# Altium PCB TP5602(生产过的板）-20160328.PcbDoc
Units mm, origin at the board's own origin, x right, y up, seen from the top; angles counter-clockwise.
Board outline 64.59 x 20.7 mm, 2 copper layers (Top Layer, Bottom Layer); 52 components, 28 nets, 152 pads, 418 vias.
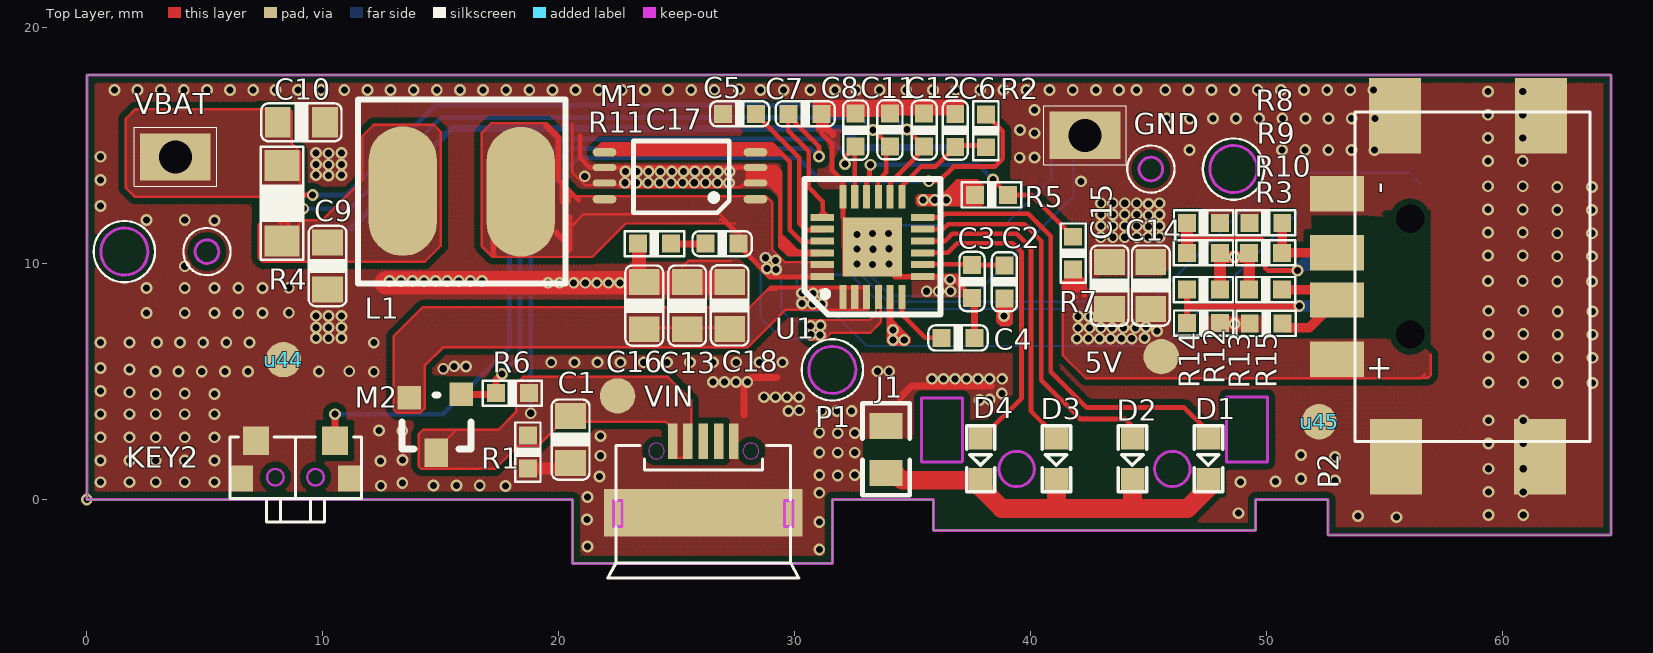
[diagram p0: Top Layer view]
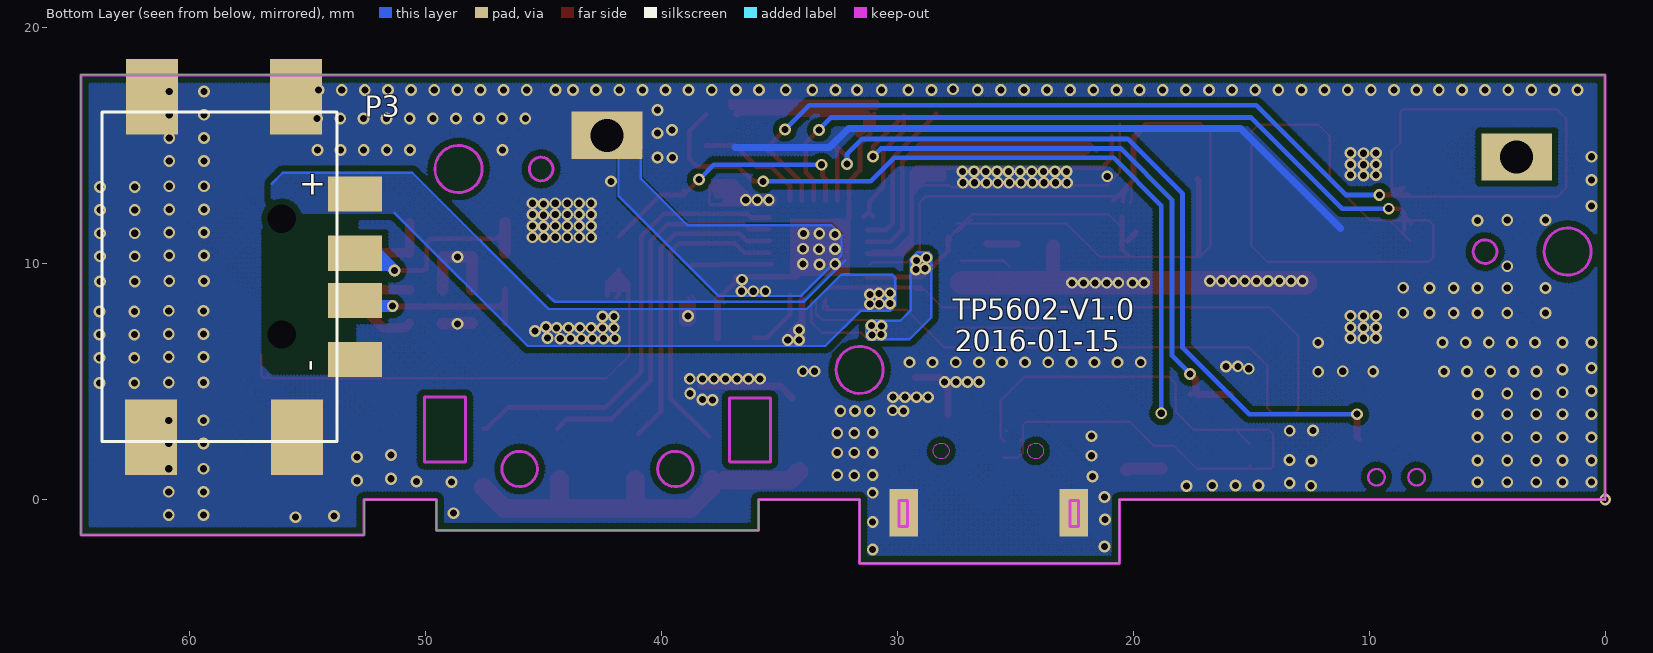
[diagram p1: Bottom Layer view, seen from below]

## Layer stack, top to bottom
Top Layer: signal copper 0.0356
Dielectric: core 0.32, FR-4, Dk 4.8
Bottom Layer: signal copper 0.0356

## Board outline
20.591,0 20.591,-2.7 31.591,-2.7 31.591,0 35.871,0 35.871,-1.3 49.531,-1.3 49.531,0 52.591,0 52.591,-1.5 64.591,-1.5 64.591,18 0,18 0,0

## Design rules (kind name [scope] priority, off if disabled: settings)
Clearance [All] p1: gap=0.254
Clearance ALL [All] p2: gap=0.254
Clearance "polygon to polygon" [InPolygon vs InPolygon] p3: gap=0.3
Clearance "ALL to polygon" [All vs InPolygon] p4: gap=0.3
ComponentClearance [All] p1: gap=0.1 collisioncheckmode=3 verticalgap=0.1 showdistances=FALSE
PlaneConnect [All] p1: planeconnectstyle=Direct reliefexpansion=0.508 reliefentries=4 reliefconductorwidth=0.254 reliefairgap=0.254
PolygonConnect [All] p1: connectstyle=Direct reliefconductorwidth=0.254 reliefentries=4 polygonreliefangle="90 Angle"
RoutingVias [All] p1: holewidth=0.3 width=0.5 viastyle="Through Hole" minholewidth=0.3 minwidth=0.5 maxholewidth=0.3 maxwidth=0.5
SilkscreenOverComponentPads SilkToSolderMaskClearance [IsPad] p1: minsilkscreentomaskgap=0.254
SolderMaskExpansion [All] p1: expansion=0.102
TestPointUsage [All] p1: valid=0 allowmultiple=FALSE
Testpoint [All] p1: side=3 testpointundercomponent=TRUE minsize=1.016 maxsize=2.54 preferedsize=1.524 minholesize=0 maxholesize=1.016 preferedholesize=0.813 testpointgrid=0.025 style=297 order=0-112345678
Width [All] p1: maxlimit=2 minlimit=0.1 preferedwidth=0.2
21 further rules are at their usual default settings.

## Components (designator, comment, footprint, x,y, rotation, side; value= is the part's Value field where it differs from the comment)
5V "Comment" TP1.5 45.53,6.06 r270 top
C1 "22uF/1206/10V" C_0805 20.499,3.543 r270 top
C2 "2.2uF/0603/10V" C_0603 38.88,9.93 r270 top
C3 "1uF/0603/10V" C_0603 37.51,9.94 r270 top
C4 "1uF/0603/10V" C_0603 36.22,6.85 r0 top
C5 "4.7uF/0603/10V" C_0603 28.36,16.35 r180 top
C6 "2.2uF/0603/10V" C_0603 36.8,16.35 r270 top
C7 "100nF/0603/10V" C_0603 31.14,16.35 r180 top
C8 "100nF/0603/10V" C_0603 32.58,14.96 r90 top
C9 "22uF/0805/10V" C_0805 10.2,10.9 r270 top
C10 "22uF/0805/10V" C_0805 8.09,15.99 r0 top
C11 "100nF/0603/10V" C_0603 34.03,16.37 r270 top
C12 "100nF/0603/10V" C_0603 35.48,16.36 r270 top
C13 "22uF/0805/10V" C_0805 25.44,7.22 r90 top
C14 "22uF/0805/10V" C_0805 45.09,8.07 r90 top
C15 "22uF/0805/10V" C_0805 43.34,8.07 r90 top
C16 "100nF/0805/10V" C_0805 23.62,7.22 r90 top
C17 "22nF/0805/25V" C_0603 27.617,10.851 r180 top
C18 "22uF/0805/10V" C_0805 27.24,7.23 r90 top
D1 "LED" D0603 47.53,1.74 r270 top
D2 "LED" D0603 44.317,1.74 r270 top
D3 "LED" D0603 41.083,1.74 r270 top
D4 "LED" D0603 37.88,1.74 r270 top
GND "TP" HP 42.04,15.44 r0 top
J1 "1K/1206/+/-5%" R0805 33.87,1.13 r90 top
KEY2 "Comment" "SW 2*4 CESHI" 8.84,0.95 r180 top locked
L1 "Comment" L-CD75 15.89,13.06 r0 top
M1 "NCE8205A/TSSOP8" TSSOP-8 21.13,15.2 r0 top
M2 "NCE2301/SOT23" SOT-23 15.77,4.31 r180 top
P1 "Comment" "MICRO USB SMD" 26.141,2.46 r180 top locked
P2 "Comment" "USB SMD *10" 56.08,9.45 r90 top locked
P3 "Comment" "USB SMD *10" 56.08,9.45 r270 bottom locked
R1 "0603/1K/+/-5%" R_0603 18.69,2.71 r270 top
R2 "1M/0603+/-5%" R_0603 38.1,16.33 r270 top
R3 "NC/0603" R_0603 49.28,7.47 r0 top
R4 "14mOHM/1206/+/-1%" R_1206 8.27,10.96 r270 top
R5 "100K/0603/+/-1%" R_0603 37.64,12.91 r0 top
R6 "1M/0603+/-5%" R_0603 17.33,4.51 r0 top
R7 "1M/0603/+/-1%" R_0603 41.8,11.14 r270 top
R8 "NC/0603" R_0603 49.26,11.73 r0 top
R9 "NC/0603" R_0603 50.652,10.46 r180 top
R10 "NC/0603" R_0603 50.652,8.9 r180 top
R11 "3ohm/0805/+/-5%" R_0603 24.75,10.846 r180 top
R12 "" R_0603 46.62,10.46 r0 top (schematic designator RA4)
R13 "" R_0603 46.62,8.9 r0 top (schematic designator RB4)
R14 "" R_0603 48.02,11.73 r180 top (schematic designator RA3)
R15 "" R_0603 48.022,7.48 r180 top (schematic designator RB3)
U1 "TP5602" "TP5602 QFN4X4-24" 33.29,10.71 r90 top
u44 "Comment" TP1.5 8.33,5.93 r270 top
u45 "Comment" TP1.5 52.22,3.3 r270 top
VBAT "TP" HP 4.001,14.526 r180 top
VIN "Comment" TP1.5 22.49,4.4 r270 top

## Footprints (in the part's own frame and the unit in brackets; to place one, negate y for a bottom-side part, rotate by r counter-clockwise, add the part's x,y. Pads: shape width x height; smd on the part's side, far side on the other; paste and mask are expansions set on the pad)
C_0603 [mil]
  rect 30x30 smd: 1(0,0) 2(55,0)
  silkscreen extent -22,-21 77,21
C_0805 [mm]
  rect 1.1x1.3 smd: 1(0,0) 2(2,0)
  silkscreen extent -0.7,-0.8 2.7,0.8
D0603 [mm] "LED"
  rect 1x1 smd: 1(-0.889,0) 2(0.889,0)
  silkscreen extent -1.4,-0.6 1.4,0.6
HP [mm]
  rect 3x2 hole 1.4: 1(0.254,0)
  silkscreen extent -1.5,-1.25 2,1.25
L-CD75 [mm]
  oval 2.9x5.5 smd: 1(-2.5,0.013) 2(2.5,-0.013)
  silkscreen extent -4.4,-3.9 4.4,3.9
"MICRO USB SMD" [mm]
  rect 0.4x1.5 smd: 1(1.32,-0.01) 2(0.67,-0.01) 3(0.02,-0.01) 4(-0.63,-0.01) 5(-1.28,-0.01)
  rect 1.2x2 all layers, no hole: 5(-3.58,3.019) 5(3.62,3.019)
  rect 7x2 smd: 5(0.02,3.019)
  Keep-Out Layer circle w0.025: c-1.997,0.399 r0.336
  Keep-Out Layer circle w0.025: c2.003,0.399 r0.336
  Keep-Out Layer lines w0.127: 3.818,3.597 3.468,3.597 3.468,2.497 3.818,2.497 3.818,3.597 ; -3.432,3.597 -3.432,2.497 -3.782,2.497 -3.782,3.597 -3.682,3.597 -3.432,3.597
  silkscreen extent -4.03,0.16 4.07,5.78
R0805 [mm]
  rect 1.1x1.4 smd: 1(0,0) 2(2,0)
  silkscreen extent -0.95,-1 2.95,1
R_0603 [mil]
  rect 30x30 smd: 1(0,0) 2(55,0)
  silkscreen extent -22,-21 77,21
R_1206 [mm]
  rect 1.3x1.5 smd: 1(0,0) 2(-3.2,0)
  silkscreen extent -4,-0.9 0.8,0.9
SOT-23 [mm]
  rect 1x1.2 smd: d(0.965,2.323)
  rect 1x1 smd: g(-0.1,-0.15) s(2.1,0)
  silkscreen extent -0.51,-0.13 2.41,2.16
"SW 2*4 CESHI" [mm]
  rect 1x1.1 smd: 1(-2.3,0.05) 1(2.3,0.05)
  rect 1.1x1.2 smd: 3(-1.675,-1.55) 4(1.675,-1.55)
  Keep-Out Layer circle w0.1: c0.85,0 r0.35
  Keep-Out Layer circle w0.1: c-0.85,0 r0.35
  silkscreen extent -2.79,-1.7 2.77,1.9
TP1.5 [mm] "1.5MM测试点"
  round 1.5 smd: 1(0,0)
"TP5602 QFN4X4-24" [mm]
  rect 2.5x2.5 smd: 0(0,0)
  rect 1x0.3 smd: 1(-2.125,1.25) 2(-2.125,0.75) 3(-2.125,0.25) 4(-2.125,-0.25) 5(-2.125,-0.75) 6(-2.125,-1.25) 13(2.125,-1.25) 14(2.125,-0.75) 15(2.125,-0.25) 16(2.125,0.25) 17(2.125,0.75) 18(2.125,1.25)
  rect 0.3x1 smd: 7(-1.25,-2.125) 8(-0.75,-2.125) 9(-0.25,-2.125) 10(0.25,-2.125) 11(0.75,-2.125) 12(1.25,-2.125) 19(1.25,2.125) 20(0.75,2.125) 21(0.25,2.125) 22(-0.25,2.125) 23(-0.75,2.125) 24(-1.25,2.125)
  silkscreen extent -2.88,-2.88 2.88,2.88
TSSOP-8 [mm]
  oval 1x0.35 smd: 1(7.206,-2.47) 4(7.206,-0.48) 5(0.806,-0.48) 8(0.806,-2.47)
  oval 1x0.3 smd: 2(7.206,-1.78) 3(7.206,-1.13) 6(0.806,-1.13) 7(0.806,-1.78)
  silkscreen extent 2.03,-3.05 6.1,0
"USB SMD *10" [mm]
  rect 3.2x2.2 smd: 0(-7.625,-5.5) 0(-7.625,0.6) 0(6.81,-5.54) 0(6.81,0.64)
  rect 1.5x2.3 smd: 1(-3.5,3.1) 2(-0.99,3.1) 3(1.01,3.1) 4(3.51,3.1)
  round 1 hole 1.2 unplated: 7(2.45,0) 8(-2.45,0)
  silkscreen extent -6.98,-7.62 6.98,2.35

## Part data
C1 C2 C3 C4 C5 C6 C7 C8 C9 C10 C11 C12 C13 C14 C15 C16 C17 C18: library part CAP, "Capacitor"
J1 R9 R10 R11: library part RES1
M1: library part "MOSFET N"
M2: library part "MOSFET P"
R1 R2 R3 R4 R5 R6 R7 R8 R12 R13 R14 R15: library part (R)ordinary

## Via types
v1: diameter 0.5, hole 0.3, Top Layer to Bottom Layer, tented both sides, 418 vias

## Nets (pads, with @x,y where several pads share a name; then routed paths per layer and width w, separated by ;. In a path a pad name is that pad's centre, name@x,y a point inside that pad or via, vN(x,y) a via of type N, cw(c..) or ccw(c..) an arc to the next point about the centre after c; other vN are vias at no path point)
D1-: P3.2 R12.1 R14.2 | length 9.1
  Top Layer w0.2: 46.62,11.06 49.76,11.06 49.94,10.88 49.94,9.81 50.04,9.71 v1(51.3,9.71)
  Top Layer w0.5: R12.1 46.62,11.06 R14.2@46.62,11.727
  Bottom Layer w0.2: P3.2@52.03,10.44 P3.2
  Bottom Layer w0.5: v1(51.3,9.71) P3.2@52.03,10.44
D2+: P3.3 R13.1 R15.2 | length 10.2
  Top Layer w0.254: R15.2 46.625,8.18 ; R13.1@46.625,8.895 46.625,8.18 ; v1(51.38,8.2) 51.36,8.18 46.625,8.18
  Bottom Layer w0.3: P3.3@52.4,9.02 P3.3 P3.3@52.47,8.44 ; P3.3@53,9.02 P3.3@53.02,9.02 ; P3.3@53.52,8.52 P3.3@53.02,9.02 ; P3.3@53.64,9.02 P3.3@53.02,9.02
  Bottom Layer w0.5: v1(51.38,8.2) P3.3@52.74,8.2
D+: P2.3 R8.2 R9.1 | length 3.6
  Top Layer w0.4: R8.2 50.652,11.725 50.652,11.064 R9.1 P2.3
D-: P2.2 R3.2 R10.1 | length 5.4
  Top Layer w0.4: R10.1 52.54,8.9 P2.2 51.81,7.29 50.857,7.29 R3.2
GND: C1.2 C3.2 C4.2 C5.2 C6.1 C7.1 C8.2 C9.2 C10.2 C11.1 C12.1 C13.2 C14.2 C15.2 C16.2 C18.2 GND.1 J1.2 KEY2.1 KEY2.4 M1.2 M1.3 M1.6 M1.7 P1.5 P2.0 P2.4 P3.0 P3.4 R1.2 R3.1 R5.1 R8.1 R11.2 R14.1 R15.1 U1.0 U1.7 U1.18 U1.22 u44.1 u45.1 | length 189.3
  Top Layer w0.1: 20.57,15.94 20.57,13.86 21.1,13.33 22.49,13.33 22.58,13.24 27.7,13.24 27.78,13.32 28.95,13.32 29.38,12.89 29.39,12.89 ; 25.233,9.86 25.493,10.12 27.299,10.12 ; 30.946,15.68 30.946,16.326 C7.1@30.97,16.35 ; C7.1@31.41,16.26 31.41,15.78 31.51,15.68 ; U1.7@35.8,9.47 35.84,9.51 36.86,9.51 36.879,9.491 36.879,9.271 36.93,9.22 ; v1@36.25,12.8 36.85,13.4 36.85,13.43 37.73,13.43 37.79,13.37 ; v1@36.3,12.68 36.686,13.066 36.686,13.236 ; v1@36.356,12.8 36.686,13.13 ; v1@36.63,12.6 36.7,12.53 R5.1@37.94,12.53 ; 36.64,12.51 36.68,12.47 ; 35.25,12.47 35.16,12.56 35.16,12.81 35.25,12.9 ; 35.25,12.47 37.9,12.47 37.97,12.54 37.97,13.305 37.745,13.53 36.86,13.53 36.23,12.9 35.25,12.9 ; 35.25,12.47 35.25,12.9
  Top Layer w0.2: R1.2 R1.2@18.793,1.313 ; 20.91,15.42 20.91,14.48 21.32,14.07 29.19,14.07 29.39,13.87 29.39,10.745 29.725,10.41 31.07,10.41 U1.22@31.09,10.43 ; C18.2@27.15,9.31 C18.2@27.42,9.04 ; 29.48,10.9 29.97,10.41 ; 29.48,11.11 30.18,10.41 ; 30.14,10.51 31.04,10.51 U1.22@31.12,10.43 ; 30.16,10.43 U1.22@31.28,10.43 ; C7.1@30.97,16.35 31.15,16.17 31.15,15.495 31.58,15.065 31.58,13.95 32.04,13.49 U1.18 ; 30.982,15.715 31.039,15.772 C7.1@31.039,16.281 ; C7.1@31.3,16.37 C7.1@31.41,16.26 ; U1.18@32.04,12.68 32.04,11.94 U1.0@32.25,11.73 ; U1.0@34.02,9.66 34.25,9.43 36.65,9.43 C3.2@37.45,8.63 ; U1.0@34.22,9.79 34.56,9.45 34.68,9.45 ; U1.0@34.42,9.46 U1.7@35.87,9.46 ; U1.7@35.27,9.45 U1.7@35.79,9.45 ; C3.2@37.34,8.36 C3.2@37.39,8.41
  Top Layer w0.3: 27.84,3.58 27.84,4.85 28.16,5.17 29.25,5.17 ; M1.3@28.63,13.94 28.69,13.88 29.18,13.88 29.18,13.51 29.24,13.45 29.23,13.45 28.85,13.83 28.071,13.83 28.068,13.827 28.068,13.64 28.79,13.64 29.23,13.2 ; C7.1@30.924,16.63 37.015,16.654 36.834,16.833 30.904,16.81 37.05,16.834 ; 31.627,15.467 31.42,15.675 31.42,15.68 31.27,15.83 31.27,16.34 31.3,16.37 C8.2@32.58,16.37 ; 32.414,16.798 32.58,16.632 C8.2@32.58,16.37 ; C8.2 C8.2@32.58,16.37 ; 34.45,4.31 34.95,4.81 38.33,4.81 ; C12.1@35.25,16.44 35.23,16.42 34.08,16.42 C11.1 32.593,16.37 C8.2@32.58,16.37 ; C12.1@35.39,16.42 36.73,16.42 C6.1 ; 36.68,12.68 36.685,12.686 ; 36.72,12.91 R5.1 ; 36.77,12.66 R5.1@37.26,12.66 ; 36.83,13.08 37.68,13.08 37.84,13.24 36.84,13.24 ; C3.2@37.45,8.63 C3.2@37.457,8.623 ; C3.2@37.617,8.35 C4.2 C3.2@37.62,8.523
  Top Layer w0.5: R1.2@18.793,1.313 20.237,1.313 C1.2@20.31,1.24 ; R15.1 48.61,7.48 v1(48.64,7.45) 49.26,7.45 R3.1
  Top Layer w0.6: C16.2@23.29,9.189 23.4,9.299 R11.2@23.4,10.717 ; C8.2 32.593,16.37 C8.2@32.61,16.37
  Top Layer w1: v1@12.691,9.189 C18.2@27.271,9.189
  Bottom Layer w0.1: 32.19,10.144 33.927,8.407 33.945,8.39 44.524,8.39 44.796,8.662 ; GND.1@41.08,15.74 40.87,15.53 40.87,13.61 38.89,11.63 32.79,11.63 32.36,11.2 32.36,10.35 34.08,8.63 37.57,8.63 41.81,12.87 41.81,15.14 GND.1@41.72,15.23
  Bottom Layer w0.3: 11.22,11.5 15.454,15.734 32.066,15.734 32.88,14.92 36.87,14.92
  other v1: 31.04,-2.11 21.22,-1.98 31.04,-0.95 21.2,-0.84 55.501,-0.742 53.871,-0.695 59.4,-0.65 60.87,-0.65 48.799,-0.573 21.22,0.11 31.04,0.29 59.4,0.33 60.87,0.33 12.46,0.59 17.74,0.58 14.69,0.6 15.67,0.6 16.65,0.6 13.37,0.7 0.58,0.74 1.809,0.74 2.919,0.74 4.149,0.74 5.409,0.74 48.893,0.748 50.37,0.773 52.89,0.8 52.89,0.81 51.45,0.89 51.45,0.88 21.72,0.98 31.82,1.02 31.04,1.04 32.54,1.04 59.4,1.31 60.87,1.31 0.58,1.66 1.809,1.66 2.919,1.66 4.149,1.66 5.409,1.66 12.44,1.64 13.38,1.68 52.89,1.806 21.77,1.86 51.45,1.886 31.82,1.99 32.54,1.99 31.04,2 59.4,2.38 60.87,2.38 0.58,2.64 1.809,2.64 2.919,2.64 4.149,2.64 5.409,2.64 21.77,2.69 31.82,2.83 32.54,2.83 31.04,2.84 12.38,2.93 13.37,2.92 59.4,3.36 60.87,3.36 0.58,3.62 1.809,3.62 2.919,3.62 4.149,3.62 5.409,3.62 29.73,3.75 31.16,3.75 31.79,3.75 32.41,3.75 30.188,3.784 37.83,4.22 38.26,4.24 28.69,4.342 29.18,4.342 29.67,4.342 30.18,4.342 2.919,4.47 5.409,4.48 4.149,4.5 38.774,4.502 1.809,4.55 0.58,4.6 62.33,4.94 63.8,4.94 26.53,4.979 27.02,4.979 27.51,4.979 27.989,4.979 59.4,4.97 60.87,4.97 35.81,5.12 36.3,5.12 36.79,5.12 37.28,5.12 37.77,5.12 38.26,5.12 38.79,5.12 12.16,5.42 2.91,5.43 3.89,5.43 4.87,5.43 5.85,5.43 6.83,5.43 9.83,5.43 11.12,5.44 33.51,5.44 34,5.44 1.81,5.52 15.103,5.545 0.58,5.58 15.566,5.648 16.067,5.644 19.68,5.82 20.66,5.82 21.64,5.82 22.62,5.82 23.6,5.82 24.58,5.82 25.56,5.82 26.54,5.82 27.52,5.82 28.5,5.82 29.48,5.82 62.33,6.01 63.8,6.01 59.4,6.04 60.87,6.04 0.58,6.66 1.81,6.66 2.97,6.66 3.95,6.66 4.93,6.66 5.91,6.66 6.89,6.66 12.16,6.65 10.24,6.84 9.71,6.85 10.79,6.85 62.33,6.99 63.8,6.99 59.4,7.02 60.87,7.02 9.71,7.3 10.24,7.29 10.79,7.3 10.24,7.78 9.71,7.79 10.79,7.79 2.529,7.91 4.149,7.91 5.409,7.91 6.42,7.91 7.45,7.91 8.56,7.92 62.33,7.97 63.8,7.97 59.4,8 60.87,8 35.59,8.83 36.1,8.83 36.6,8.83 2.529,8.97 4.149,8.97 5.409,8.97 6.42,8.97 7.45,8.97 8.56,8.98 19.545,9.188 20.035,9.188 20.63,9.189 21.12,9.189 21.61,9.189 22.1,9.189 22.59,9.189 62.31,9.24 63.78,9.24 12.82,9.27 13.31,9.27 13.8,9.27 14.29,9.27 14.78,9.27 15.27,9.27 15.76,9.27 16.25,9.27 16.74,9.27 59.38,9.27 60.85,9.27 36.58,9.32 4.149,9.89 32.63,9.98 33.29,9.97 34,9.98 62.31,10.31 63.78,10.31 59.38,10.34 60.85,10.34 32.64,10.62 33.31,10.61 33.99,10.63 42.97,11.12 43.477,11.12 43.983,11.12 44.49,11.12 44.97,11.12 45.45,11.12 32.64,11.23 33.3,11.28 33.97,11.28 62.31,11.29 63.78,11.29 59.38,11.32 60.85,11.32 44.99,11.571 42.97,11.6 43.477,11.6 43.983,11.6 44.49,11.6 45.45,11.6 5.409,11.83 2.529,11.85 4.149,11.85 44.99,12.051 42.97,12.08 43.477,12.08 43.983,12.08 44.49,12.08 45.45,12.08 62.31,12.27 63.78,12.27 59.38,12.3 60.85,12.3 0.58,12.44 44.99,12.531 42.97,12.56 43.477,12.56 43.983,12.56 44.49,12.56 45.45,12.56 35.44,12.7 35.93,12.7 36.42,12.7 62.31,13.25 63.78,13.25 59.38,13.28 60.85,13.28 22.8,13.43 23.29,13.43 23.78,13.43 24.27,13.43 24.76,13.43 25.25,13.43 25.74,13.43 26.219,13.43 26.72,13.43 27.21,13.43 42.13,13.49 0.58,13.55 21.1,13.7 9.71,13.75 10.24,13.74 10.79,13.75 22.83,13.9 23.32,13.9 23.81,13.9 24.3,13.9 24.79,13.9 25.28,13.9 25.77,13.9 26.249,13.9 26.75,13.9 27.24,13.9 9.71,14.2 10.24,14.19 10.79,14.2 59.38,14.35 60.85,14.35 39.53,14.49 40.16,14.5 0.58,14.53 9.71,14.69 10.24,14.68 10.79,14.69 46.73,14.82 50.65,14.82 51.63,14.82 52.61,14.82 53.59,14.82 54.57,14.82 59.38,15.33 60.85,15.33 40.16,15.53 39.55,15.66 45.76,16.15 46.74,16.15 47.72,16.15 48.7,16.15 49.68,16.15 50.66,16.15 51.64,16.15 52.62,16.15 53.6,16.15 54.58,16.15 59.38,16.31 60.85,16.31 40.16,16.51 59.38,17.29 60.85,17.29 1.17,17.36 2.15,17.36 3.13,17.36 4.11,17.36 5.09,17.36 6.07,17.36 7.05,17.36 8,17.36 8.95,17.36 9.93,17.36 10.91,17.36 11.89,17.36 12.87,17.36 13.85,17.36 14.83,17.36 15.81,17.36 16.79,17.36 17.77,17.36 18.75,17.36 19.73,17.36 20.71,17.36 21.69,17.36 22.67,17.36 23.65,17.36 24.63,17.36 25.61,17.36 26.59,17.36 28.55,17.36 29.53,17.36 30.658,17.36 31.708,17.36 32.618,17.36 33.598,17.36 34.725,17.36 35.853,17.36 36.833,17.36 37.86,17.36 38.84,17.36 39.82,17.36 40.8,17.36 41.78,17.36 42.76,17.36 43.74,17.36 44.48,17.36 45.7,17.36 46.68,17.36 47.66,17.36 48.64,17.36 49.62,17.36 50.6,17.36 51.58,17.36 52.56,17.36 53.54,17.36 54.52,17.36 27.64,17.39
NetC2_1: C2.1 C3.1 U1.8 | length 3.5
  Top Layer w0.2: U1.8@35.29,9.97 C3.1@37.51,9.97 ; C3.1 38.76,9.94 C2.1@38.77,9.93
NetC4_1: C4.1 U1.6 | length 2.8
  Top Layer w0.2: U1.6@34.54,8.68 34.54,7.85 35.53,6.86 C4.1@36.06,6.86
NetC5_1: C5.1 U1.20 | length 6.6
  Top Layer w0.2: C5.1 28.36,16.314 30.19,14.484 30.19,11.71 30.47,11.43 U1.20@31.29,11.43
NetC6_2: C6.2 R2.2 U1.13 | length 5.1
  Top Layer w0.2: U1.13@34.54,12.68 34.54,13.29 35.37,14.12 35.967,14.12 36.857,15.01 R2.2@38.113,15.01 ; C6.2@36.679,14.953 C6.2 ; C6.2@36.8,14.88 C6.2@36.8,14.997
NetC7_2: C7.2 M2.g R6.1 U1.19 | length 31.6
  Top Layer w0.2: R6.1@17.2,4.38 R6.1 ; R6.1@17.53,4.42 R6.1@17.59,4.48 ; U1.19@31.02,11.98 31.21,12.17 ; v1(31.03,14.54) 31.03,14.96 29.72,16.27 29.72,15.63 30.59,14.76 30.59,13.23 31.19,12.63 31.19,12.21 U1.19@31.43,11.97
  Top Layer w0.254: R6.1@17.28,4.46 R6.1
  Top Layer w0.3: M2.g R6.1@17.28,4.46 ; R6.1 17.33,5.06 v1(17.59,5.32)
  Bottom Layer w0.2: v1@17.58,5.33 18.36,6.11 18.36,12.71 20.534,14.884 30.686,14.884 v1(31.03,14.54)
NetC8_1: C8.1 KEY2.3 U1.17 | length 35.4
  Top Layer w0.2: KEY2.3@10.4,2.55 KEY2.3@10.51,2.66 ; v1(32.13,14.22) 32.13,14.52 32.54,14.93 U1.17@32.54,12.68 ; C8.1@32.55,14.93 C8.1 C8.1@32.56,14.98 ; C8.1@32.58,14.81 C8.1@32.58,14.95
  Top Layer w0.3: KEY2.3@10.51,2.66 v1(10.51,3.62)
  Bottom Layer w0.2: v1(10.51,3.62) 15.09,3.62 17.91,6.44 17.91,12.96 20.234,15.284 31.476,15.284 32.13,14.63 v1(32.13,14.22)
NetC9_1: C9.1 C11.2 L1.1 R4.1 U1.15 | length 57.7
  Top Layer w0.1: R4.1 9.15,11.84 ; 7.29,10.24 7.29,11.66 7.47,11.84 9.97,11.84 11.67,13.54 11.67,15.4 12.16,15.89 14.7,15.89 15,15.59 15,10.76 14.32,10.08 7.45,10.08 7.29,10.24
  Top Layer w0.2: 8.226,11.716 8.51,12 8.51,12.05 ; R4.1@8.51,11.431 8.51,12.16 8.68,12.33 v1(9.17,12.33) ; 8.51,12.04 8.51,12.01 8.68,11.84 ; v1@33.31,15.69 33.89,15.11 C11.2@33.89,14.955 ; U1.15@33.54,12.68 33.54,13.524 33.88,13.864 C11.2@33.88,14.955
  Bottom Layer w0.2: v1(9.17,12.33) 11.14,12.33 15,16.19 32.81,16.19 v1@33.31,15.69
  other v1: 33.31,15.67
NetC13_1: 
NetC17_1: C17.1 L1.2 M1.1 M1.8 U1.4 U1.23 U1.24 | length 84.4
  Top Layer w0.1: 17.21,10.28 17.16,10.33 17.16,13.59 L1.2@17.23,13.66 ; 20.14,12.57 20.07,12.64 20.07,15.38 19.5,15.95 17.14,15.95 16.74,15.55 16.74,10.73 17.19,10.28 21.42,10.28 22.841,11.701 27.474,11.701 ; 20.19,13.34 20.68,12.85 ; 20.22,13.11 20.48,12.85 28.8,12.85 29.04,12.61 29.04,10.6 29.58,10.06 31.065,10.06 U1.23 ; 20.47,11.51 21.06,12.1 26.81,12.1 27.72,11.19 C17.1@27.72,11 ; 26.809,11.86 26.89,11.86 27.432,11.318 ; 27.08,11.701 27.082,11.701 27.303,11.48 ; U1.4@33.47,8.45 33.442,8.423 33.442,7.873 33.18,7.61 30.63,7.61 30.47,7.45 30.47,6.92 30.61,6.78 31.24,6.78 31.53,7.07 33.2,7.07 33.637,7.508 33.637,8.403 U1.4@33.61,8.43
  Top Layer w0.2: 17.29,10.36 17.23,10.42 17.23,13.51 L1.2@17.32,13.6 ; 19.42,15.84 19.95,15.31 19.95,13.58 20.845,12.685 ; 20.24,10.36 20.47,10.59 20.47,11.98 ; 20.42,12.62 20.42,13.11 ; C17.1@27.85,11.14 27.85,10.52 28.94,9.43 U1.24@31.29,9.43
  Top Layer w0.254: 19.9,11.31 20.24,10.97
  Bottom Layer w0.1: 28.56,7.72 28.56,10.37 28.67,10.48 29.16,10.48 29.42,10.22 29.42,8.03 29.87,7.58 31.15,7.58 31.31,7.42 31.31,6.87 31.24,6.8 29.48,6.8 28.56,7.72
  other v1: 31.07,6.97 30.68,6.99 30.67,7.36 31.09,7.38 29.21,9.75 28.82,9.8 29.19,10.14 28.76,10.25
NetC17_2: C17.2 R11.1 | length 1.3
  Top Layer w0.3: R11.1@24.91,10.83 26.199,10.83 C17.2
NetD1_A: D1.1 U1.12 | length 19.3
  Top Layer w0.2: U1.12 36.2,11.96 36.36,12.12 39.9,12.12 40.85,11.17 40.85,5.42 42.37,3.9 46.51,3.9 47.41,3 D1.1@47.54,3
NetD1_K: D1.2 D2.2 D3.2 D4.2 J1.1 | length 16.4
  Top Layer w0.8: J1.1@34.165,1.195 34.54,0.82 37.31,0.82 ; D4.2@37.85,0.851 37.85,0.54 38.76,-0.37 46.65,-0.37 D1.2@47.53,0.51 ; 41.083,-0.37 D3.2 ; 44.317,-0.307 D2.2
NetD2_A: D2.1 U1.11 | length 16.1
  Top Layer w0.2: U1.11 36.28,11.46 36.494,11.674 39.736,11.674 40.45,10.96 40.45,5.06 42.09,3.42 43.99,3.42 D2.1@44.4,3.01
NetD3_A: D3.1 U1.10 | length 13.2
  Top Layer w0.2: U1.10 36.37,10.96 36.675,11.265 39.415,11.265 40.01,10.67 40.01,3.75 D3.1@40.97,2.79
NetD4_A: D4.1 U1.9 | length 13
  Top Layer w0.2: U1.9 36.49,10.46 36.89,10.86 39.24,10.86 39.61,10.49 39.61,4.304 D4.1@37.973,2.667
NetM1_1: M1.4 M1.5 U1.21 | length 44
  Top Layer w0.1: M1.5 22.056,14.6 22.97,14.6 28.36,14.6 M1.4@28.48,14.72 ; 27.78,14.6 29.438,14.6
  Top Layer w0.2: M1.5@21.57,14.78 21.84,15.05 29.05,15.05 29.79,14.31 29.79,11.43 30.29,10.93 U1.21@31.29,10.93 ; M1.5 29.38,14.72 ; 29.16,14.94 21.73,14.94 21.84,14.83 29.27,14.83
NetR5_2: R5.2 R7.1 U1.16 | length 11.7
  Top Layer w0.2: U1.16@33.04,12.68 33.04,13.6 33.17,13.73 v1@33.17,14.19 ; v1(38.4,13.56) 38.4,13.547 R5.2 40.03,12.91 R7.1 ; R5.2@39.037,12.98 R5.2@39.037,13.083
  Bottom Layer w0.2: v1@33.2,14.09 v1@33.29,14.18 ; v1(33.21,14.19) 37.77,14.19 v1(38.4,13.56)
NetRA3_2: 
NetRB3_2: 
NewNet1: 
VBAT: C10.1 C12.2 R4.2 U1.14 VBAT.1 | length 55.6
  Top Layer w0.1: 8.67,13.251 8.699,13.251 9.04,12.91 ; 9.22,12.91 9.04,13.09 9.04,13.23 ; 9.04,13.23 8.65,12.84 2.02,12.84 1.65,13.21 1.65,16.14 2.06,16.55 8.58,16.55 8.68,16.45 8.68,15.1 9.04,14.74 9.04,13.23
  Top Layer w0.2: 8.364,12.931 8.385,12.91 9.12,12.91 ; 8.559,13.221 8.87,12.91 v1(9.57,12.91) ; 8.87,13.154 9.1,12.924 9.1,12.91 ; U1.14@34.04,12.68 34.04,13.42 C12.2@35.447,14.827 ; v1(34.76,15.68) 35.35,15.09 C12.2@35.35,14.85 ; C12.2@35.424,14.85 C12.2@35.48,14.794
  Bottom Layer w0.2: v1@9.656,12.824 v1(9.57,12.91) 10.99,12.91 14.79,16.71 33.73,16.71 v1(34.76,15.68)
VIN: C1.1 M2.d P1.1 P1.2 R1.1 R2.1 R6.2 VIN.1 | length 64.4
  Top Layer w0.1: M2.d@15.04,1.46 15.19,1.31 ; M2.d@15.06,2.36 15.66,2.96 ; P1.1@24.67,2.621 P1.1 ; P1.2@25.35,2.89 P1.2@25.38,2.92 ; P1.2 25.62,2.619 25.62,4.2 24.61,5.21 18.5,5.21 18.19,4.9 18.19,3.71 17.44,2.96 14.25,2.96 14.06,2.77 14.06,1.42 14.17,1.31 17.31,1.31 18.29,2.29 19.14,2.29 20.15,3.3 24.53,3.3 24.67,3.16 24.67,2 24.9,1.77 25.5,1.77 P1.2@25.52,1.79
  Top Layer w0.2: v1(35.68,13.489) 36.109,13.489 36.734,14.114 38.471,14.114 38.81,14.453 38.81,15.62 R2.1
  Bottom Layer w0.2: v1(18.81,3.66) 18.81,12.46 20.834,14.484 30.126,14.484 31.121,13.489 v1(35.68,13.489)
VOUT: 5V.1 C2.2 C13.1 C14.1 C15.1 C16.1 C18.1 M2.s P2.1 P3.1 R7.2 R9.2 R10.2 R12.2 R13.2 U1.1 U1.2 U1.3 U1.5 | length 164.7
  Top Layer w0.1: C16.1@23.63,7.28 27.52,7.28 C18.1@27.55,7.25 ; 28.84,8.9 29.24,8.9 ; 28.91,8.96 32.89,8.96 U1.3@32.97,8.88 ; 32.88,8.04 U1.3@33.1,8.26 ; U1.3@32.94,8.17 U1.3@32.94,8.22 ; U1.3@33.04,8.2 U1.3@33.04,8.56 ; U1.3@33.04,8.87 32.89,9.02 28.96,9.02 28.09,8.15 14.23,8.15 13,6.92 13,3.83 13.15,3.68 14.12,3.68 14.32,3.88 14.32,5.68 15.09,6.45 28.01,6.45 29.6,8.04 33.08,8.04 33.14,8.1 33.14,8.22 U1.3@33.1,8.26 ; U1.3@33.1,8.42 U1.3@33.1,8.26 ; v1@34.04,7.39 v1@34.74,6.69 ; 34.04,7.49 34.12,7.57 34.12,7.69 34.14,7.71 ; v1@34.09,6.75 34.19,6.65 34.36,6.65 34.4,6.61 34.61,6.61 v1@34.62,6.62 ; v1@34.14,6.59 34.14,7.484 34.14,7.43 34.49,7.08 34.74,6.83 v1@34.74,6.69 ; v1@34.22,7.374 34.25,7.344 v1@34.25,6.64 ; v1@34.342,7.228 34.49,7.228 ; 38.649,7.481 38.649,8.342 C2.2@38.87,8.563 ; C2.2@38.73,8.65 38.57,8.49 38.57,7.56 38.74,7.39 ; C2.2@38.74,8.433 38.74,7.39 ; 38.84,7.39 38.84,8.37 C2.2@38.88,8.41 ; 38.94,7.39 38.94,8.33 C2.2@38.96,8.35 ; C2.2@39.01,8.31 39.02,8.3 39.02,7.39 ; C2.2@39.105,8.305 39.1,8.3 39.1,7.39 ; C2.2@39.19,8.39 39.19,7.48 39.1,7.39 ; 41.35,8.69 41.35,6.12 42.33,5.14 56.52,5.14 56.7,5.32 ; 41.4,8.74 41.58,8.92 ; 56.54,5.16 56.84,5.16 56.95,5.27 56.95,6.14 ; U1.5 33.94,8.485 33.94,6.68 34.07,6.55 34.74,6.55 34.874,6.684 34.874,6.86 34.14,7.594 34.14,8.485 U1.5 ; U1.5 34.04,6.82 34.2,6.66 34.71,6.66 v1@34.74,6.69 ; 38.74,7.39 39.1,7.39
  Top Layer w0.2: 41.4,8.45 41.4,9.2 R7.2@41.85,9.65 ; 41.4,8.9 42.16,8.9 42.29,9.03 41.63,9.03 41.6,9.06 ; 41.53,9.33 42.17,9.33 ; 41.68,8.92 41.42,9.18 42.163,9.18 42.242,9.258 ; R7.2@41.8,9.7 42.29,9.21 42.29,8.657 42.273,8.64 ; R7.2 41.8,8.691 41.912,8.579
  Top Layer w0.5: R13.2 48.017,10.28 v1(48.63,10.28) 49.255,10.28 R10.2
  Bottom Layer w0.1: 30.09,8.53 v1(30.31,8.75) ; 51.3,12.15 45.66,6.51 33.05,6.51 31.56,8 30.31,8 30.09,8.22 30.09,9.41 30.21,9.53 32.38,9.53 33.83,8.08 44.78,8.08 50.55,13.85 56.04,13.85 56.51,13.38
  other v1: 34.16,6.77 34.64,6.77 41.96,6.82 42.44,6.82 42.92,6.82 43.38,6.82 43.84,6.82 44.28,6.82 44.825,6.85 45.35,7.15 34.16,7.19 42.01,7.28 42.49,7.28 42.97,7.28 43.45,7.28 43.93,7.28 44.43,7.28 44.885,7.316 38.86,7.78 42.01,7.76 42.49,7.76 31.16,8.29 30.31,8.31 30.76,8.3 31.16,8.69 30.78,8.73
pads on no net: P1.3 P1.4 P2.7 P2.8 P3.7 P3.8
copper on no net:
  other v1: 0,0

## Polygon pours and split planes (outlines as drawn)
VOUT on Top Layer "Bottom Layer-No Net" (hatched 45Degree grid 0.1 track 0.1, remove dead copper, pour order 3): 41.4,9.2 41.4,6.07 42.33,5.14 56.52,5.14 56.82,5.14 56.95,5.27 56.95,6.14 56.32,6.77 46.95,6.77 46.53,7.19 46.53,8.67 46.28,8.92 41.58,8.92 41.4,8.74 41.4,9.2
GND on Top Layer "Bottom Layer-No Net" (hatched 45Degree grid 0.1 track 0.1, remove dead copper, pour order 1000): 0,18 0,0 20.591,0 20.591,-2.7 31.591,-2.7 31.591,0 35.86,0 35.871,-1.3 49.531,-1.3 49.531,0 52.591,0 52.65,-1.5 64.591,-1.5 64.591,18
NetC17_1 on Top Layer "Bottom Layer-No Net" (hatched 45Degree grid 0.1 track 0.1, remove dead copper, pour order 1002): 20.42,13.08 20.65,12.85 20.86,12.85 28.8,12.85 29.04,12.61 29.04,10.6 29.58,10.06 31.55,10.06 31.61,10 31.61,9.69 31.61,9.49 31.53,9.41 28.96,9.41 27.992,10.378 27.303,11.067 27.303,11.607 26.81,12.1 21.06,12.1 20.45,11.49 20.36,11.49 20.36,13.04 20.42,13.1
NetC17_1 on Top Layer "Bottom Layer-No Net" (hatched 45Degree grid 0.1 track 0.1, remove dead copper, pour order 1003): 30.47,7.45 30.47,6.92 30.61,6.78 31.24,6.78 31.53,7.07 33.2,7.07 33.637,7.508 33.637,8.228 33.442,8.423 33.442,7.873 33.18,7.61 30.63,7.61 30.47,7.45
GND on Top Layer "Bottom Layer-No Net" (hatched 45Degree grid 0.1 track 0.1, remove dead copper, pour order 1004): 29.267,13.003 28.95,13.32 27.78,13.32 27.7,13.24 22.58,13.24 22.49,13.33 21.1,13.33 21.1,14.061 21.214,14.176 21.32,14.07 21.81,14.07 29.19,14.07 29.39,13.87 29.39,13.125 29.267,13.003
VIN on Top Layer "Bottom Layer-No Net" (hatched 45Degree grid 0.1 track 0.1, remove dead copper, pour order 1005): 14.25,2.96 17.44,2.96 18.19,3.71 18.19,4.9 18.5,5.21 24.61,5.21 25.62,4.2 25.62,1.89 25.5,1.77 24.9,1.77 24.733,1.937 24.733,3.097 24.53,3.3 20.15,3.3 19.14,2.29 18.29,2.29 17.31,1.31 14.17,1.31 14.06,1.42 14.06,2.77 14.25,2.96
VOUT on Top Layer "Bottom Layer-No Net" (hatched 45Degree grid 0.1 track 0.1, remove dead copper, pour order 1006): 13,6.92 13,3.83 13.15,3.68 14.12,3.68 14.32,3.88 14.32,5.68 15.09,6.45 28.01,6.45 29.6,8.04 32.88,8.04 33.022,8.182 33.022,8.818 32.94,8.9 32.47,8.9 28.84,8.9 28.769,8.829 28.09,8.15 27.89,8.15 14.23,8.15 13,6.92
NetC17_1 on Top Layer "Bottom Layer-No Net" (hatched 45Degree grid 0.1 track 0.1, remove dead copper, pour order 1008): 20.47,11.5 20.24,11.27 20.24,10.36 20.32,10.28 20.56,10.28 21.42,10.28 22.841,11.701 27.498,11.701 27.511,11.713 27.124,12.1 24.8,12.1 20.917,12.1 20.47,11.653 20.47,11.39
VBAT on Top Layer "Bottom Layer-No Net" (hatched 45Degree grid 0.1 track 0.1, remove dead copper, pour order 9): 1.65,16.14 1.65,13.21 2.02,12.84 8.65,12.84 9.04,13.23 9.04,14.74 8.68,15.1 8.68,16.45 8.58,16.55 2.06,16.55 1.65,16.14
NetC9_1 on Top Layer "Bottom Layer-No Net" (hatched 45Degree grid 0.1 track 0.1, remove dead copper, pour order 7): 7.29,11.66 7.29,10.24 7.45,10.08 14.32,10.08 15,10.76 15,15.59 14.7,15.89 12.16,15.89 11.67,15.4 11.67,13.54 9.97,11.84 7.47,11.84 7.29,11.66
NetC17_1 on Top Layer "Bottom Layer-No Net" (hatched 45Degree grid 0.1 track 0.1, remove dead copper, pour order 5): 16.74,15.55 16.74,10.73 17.19,10.28 20.272,10.28 20.553,10.561 20.553,12.978 20.031,13.499 20.031,15.419 19.5,15.95 17.14,15.95 16.74,15.55
GND on Bottom Layer "Bottom Layer-No Net" (hatched 45Degree grid 0.1 track 0.1, remove dead copper, pour order 1001): 0,18 64.591,18 64.591,-1.5 52.591,-1.5 52.591,0 49.531,0 49.531,-1.3 35.871,-1.3 35.871,0 31.61,0 31.591,-2.7 20.591,-2.7 20.591,0 0,0
NetC17_1 on Bottom Layer "Bottom Layer-No Net" (hatched 45Degree grid 0.1 track 0.1, remove dead copper, pour order 1011): 28.56,10.37 28.56,7.72 29.48,6.8 31.24,6.8 31.31,6.87 31.31,7.42 31.15,7.58 29.87,7.58 29.42,8.03 29.42,10.22 29.16,10.48 28.67,10.48 28.56,10.37
VOUT on Bottom Layer "Bottom Layer-No Net" (hatched 45Degree grid 0.1 track 0.1, remove dead copper, pour order 25): 30.09,9.41 30.09,8.22 30.31,8 31.56,8 33.05,6.51 45.66,6.51 51.3,12.15 55.73,12.15 56.03,11.85 56.03,5.32 56.2,5.15 56.87,5.15 56.96,5.24 56.96,6.15 56.51,6.6 56.51,13.38 56.04,13.85 50.55,13.85 44.78,8.08 33.83,8.08 32.38,9.53 30.21,9.53 30.09,9.41
GND on Bottom Layer "Bottom Layer-No Net" (hatched 45Degree grid 0.1 track 0.1, remove dead copper, pour order 23): 32.36,11.2 32.36,10.35 34.08,8.63 37.57,8.63 41.81,12.87 41.81,14.45 41.56,14.7 41.11,14.7 40.87,14.46 40.87,13.61 38.89,11.63 32.79,11.63 32.36,11.2
GND on Bottom Layer "Bottom Layer-No Net" (hatched 45Degree grid 0.1 track 0.1, remove dead copper, pour order 21): 40.87,14.35 40.87,13.61 38.89,11.63 32.79,11.63 32.36,11.2 32.36,10.35 32.714,9.996 34.08,8.63 37.57,8.63 41.81,12.87 41.81,14.38 41.81,14.5 41.47,14.84 40.99,14.84 40.87,14.72 40.87,14.33
GND on Bottom Layer "Bottom Layer-No Net" (hatched 45Degree grid 0.1 track 0.1, remove dead copper, pour order 19): 40.87,14.71 40.87,13.61 38.89,11.63 32.79,11.63 32.36,11.2 32.36,10.35 34.08,8.63 37.57,8.63 41.81,12.87 41.81,14.41 41.29,14.93 41.11,14.93 40.87,14.69
GND on Bottom Layer "Bottom Layer-No Net" (hatched 45Degree grid 0.1 track 0.1, remove dead copper, pour order 17): 32.36,11.2 32.36,10.35 34.08,8.63 37.57,8.63 41.81,12.87 41.81,14.79 41.09,14.79 40.99,14.69 40.87,14.57 40.87,13.61 38.89,11.63 32.79,11.63 32.36,11.2

## Keep-outs
Keep-Out Layer:
  circle w0.127: c5.091,10.51 r0.5
  circle w0.127: c1.591,10.51 r1
  circle w0.127: c45.091,14.01 r0.5
  circle w0.127: c48.591,14.01 r1
  circle w0.064: c35.371,2.95 r0.032
  circle w0.127: c31.591,5.5 r1
  circle w0.127: c46.001,1.3 r0.75
  circle w0.127: c39.401,1.3 r0.75
  lines w0.127: 11.081,0 6.591,0 0,0 0,18 64.591,18 64.591,-1.5 52.591,-1.5 52.591,0 49.531,0 49.531,-1.3 35.871,-1.3 35.871,0 31.591,0 31.591,-2.7 22.111,-2.7 20.591,-2.7 20.591,0 11.091,0 ; 37.091,1.6 35.371,1.6 35.371,4.3 37.101,4.3 37.101,3.5 37.101,1.61 ; 48.301,1.6 50.031,1.6 50.031,4.351 48.301,4.351 48.301,1.6

## Other copper
Top Layer:
  region net GND: 31.996,9.455 34.546,9.468 34.533,11.937 31.983,11.923
  rectangle net VOUT: 34.04,6.59 34.32,7.38
  rectangle net VOUT: 34.14,6.55 34.31,7.484
  rectangle net VOUT: 34.25,6.55 34.74,6.93
  rectangle net VOUT: 34.14,6.904 34.666,7.09
  rectangle net VOUT: 34.25,6.996 34.574,7.19
  rectangle net VOUT: 34.342,7.08 34.49,7.228
  rectangle net GND: 35.25,12.47 36.43,12.9
  region net D2+: 46.804,8.172 46.915,8.287 46.736,8.458 46.625,8.343
  region net D2+: 46.865,8.093 46.754,8.208 46.575,8.037 46.686,7.922
  region net D1-: 46.98,10.98 46.869,11.095 46.691,10.924 46.801,10.809
  region net D1-: 46.909,11.032 47.02,11.147 46.841,11.318 46.73,11.203
  pour cut-out: 48.26,1.12 48.26,0.05 47.82,0.05 47.82,1.11 48.27,1.11
  pour cut-out: 32.825,2.63 35.205,2.63 35.205,1.73 32.835,1.73 32.835,2.61
  pour cut-out: 13.81,3.49 13.84,3.52 14.3,3.52 14.64,3.86 16.76,3.86 16.9,3.72 16.9,3.08 16.83,3.01 14.21,3.01 13.88,2.68 13.81,2.68
  pour cut-out: 47.93,1.78 47.01,1.78 46.91,1.88 46.91,2.47 46.96,2.52 48.48,2.52 48.67,2.33 48.67,1.83 48.61,1.77 47.94,1.77
  pour cut-out: 21.59,12.5 21.46,12.63 21.93,12.63 22.06,12.5
  pour cut-out: 31.7,12.25 31.7,9.2 31.85,9.05 34.68,9.05 34.84,9.21 34.85,9.21 34.85,11.99 34.59,12.25
  pour cut-out: 48.42,12.11 48.7,11.35 50.71,11.35 50.71,12.11
  pour cut-out: 37.26,13.29 37.26,12.29 38.4,12.29 38.4,13.28 37.27,13.28
  pour cut-out: 46.129,12.145 50.579,12.145 50.579,10.845 46.149,10.845 46.149,12.125
  pour cut-out: 36.755,13.91 36.755,12.22 38.385,12.22 38.385,13.91
  pour cut-out: 31.9,13.16 31.9,12.29 32.31,12.29 32.31,13.16
  pour cut-out: 34.9,9.58 35.73,9.58 35.73,9.24 34.71,9.24 34.71,9.59 34.89,9.59
  pour cut-out: 31.31,10.73 31.31,10.17 30.43,10.17 30.43,10.73
  pour cut-out: 37.11,9.55 37.11,6.79 38.32,6.79 38.32,9.56 37.12,9.56
  pour cut-out: 32.42,13.2 32.42,11.92 31.12,11.92 31.12,13.2
  pour cut-out: 34.52,8.79 34.52,9.62 34.86,9.62 34.86,8.6 34.51,8.6 34.51,8.78
  pour cut-out: 31.28,10.73 31.89,10.73 31.89,10.18 31.28,10.18
  pour cut-out: 35.74,15.54 37.65,15.54 37.65,14.71 35.74,14.71
  pour cut-out: 29.54,15.82 29.54,15.32 27.74,15.32 27.74,15.82
  pour cut-out: 30.725,16.998 37.287,16.998 37.48,17 37.48,15.68 30.37,15.68 30.37,16.34 30.36,17
  pour cut-out: 42.86,9.49 45.524,9.49 46.04,10 46.26,10.13 47.79,10.13 47.8,9.36 47.64,9.2 45.94,7.801 45.935,8.92 42.86,8.93
  pour cut-out: 37.44,8.59 37.44,7.2 35,7.2 35,8.59
  pour cut-out: 51.843,12.08 54.369,12.08 55.17,11.99 55.18,9.43 55.128,6.77 51.841,6.77
  pour cut-out: 36.45,7.83 37.31,7.83 37.31,6.68 36.45,6.68
  pour cut-out: 14.41,5.3 15.26,5.3 15.26,3.75 14.41,3.75
  pour cut-out: 28,9.94 28,8.52 28.29,8.52 28.29,9.94
  pour cut-out: 21.308,9.954 22.998,9.954 22.998,10.564 21.308,10.564
  pour cut-out: 36.72,7.21 38.27,7.21 38.27,6.4 36.72,6.4
  pour cut-out: 32.57,6.19 39.34,6.19 39.34,6.5 32.57,6.5
  pour cut-out: 37.24,15.75 37.24,15.54 37.65,15.54 37.65,15.75
  pour cut-out: 26.41,10.84 26.41,10.05 27.08,10.05 27.08,10.84
  pour cut-out: 27.299,10.564 27.299,10.038 22.981,10.038 22.981,10.564
  pour cut-out: 23.99,10.31 24.18,10.5 24.18,11.31 24.04,11.45 22.82,11.45 21.68,10.31
  pour cut-out: 35,13.33 36.356,13.33 36.356,12.27 35,12.27
  pour cut-out: 35.68,13.67 38.04,13.67 38.04,12.38 35.68,12.38
  pour cut-out: 39.17,14.44 39.17,13.41 38.81,13.41 38.81,14.44
  pour cut-out: 42.5,9.44 43.1,9.44 43.1,9.03 42.5,9.03
  pour cut-out: 6.94,12.68 6.94,11.62 8.042,11.62 8.042,12.68
  pour cut-out: 11.064,13.3 11.064,11.98 9.71,11.98 9.71,13.3
  pour cut-out: 42.485,10.141 42.474,10.13 41.07,10.13 41.07,10.74 41.12,10.79 42.402,10.79 42.485,10.707
Bottom Layer:
  rectangle net D1-: 51.4,9.69 51.89,9.99
  pour cut-out: 33.56,14.49 32.31,14.49 32.17,14.35 32.17,13.81 32.29,13.69 32.79,13.69 32.91,13.81 32.91,14.27 32.97,14.33 33.51,14.33 33.56,14.38
  pour cut-out: 40.87,14.96 40.74,14.83 40.74,13.69 38.85,11.8 32.74,11.8 32.24,11.3 32.24,10.26 34.02,8.48 37.68,8.48 41.94,12.74 41.94,15.04 40.96,15.04 40.87,14.95
  pour cut-out: 52.795,11.9 56.75,11.93 56.99,11.42 56.987,5.693 56.5,5.25 54.04,5.25 52.92,5.26

## Silkscreen, mask and mechanical layers (free items; w line width, h text height)
Top Overlay:
  circle w0.1: c31.59,5.5 r1.3
  circle w0.1: c1.59,10.51 r1.3
  circle w0.1: c5.09,10.51 r1
  circle w0.1: c45.09,14.01 r1
  circle w0.1: c48.59,14.01 r1.3
Bottom Overlay:
  text "TP5602-V1.0" at 27.654,7.614 h0.89
  text "2016-01-15" at 27.57,6.28 h0.89
Top Solder:
  rectangle: 55.39,14.55 58.64,18
  rectangle: 61.28,14.52 64.45,18
  rectangle: 61.16,0.1 64.41,3.55
  rectangle: 55.43,0.15 58.68,3.6
  pour cut-out: 21.43,11.81 20.84,11.81 20.84,10.34 20.17,10.34 20.17,9.94 21.43,9.94
Bottom Solder:
  rectangle: 55.39,14.55 58.64,18
  rectangle: 61.28,14.52 64.45,18
  rectangle: 55.43,0.15 58.68,3.6
  rectangle: 61.16,0.1 64.41,3.55
  lines w0.8: 32.97,11.14 36.6,11.14 ; 33.36,10.15 37.18,10.15 ; 34.06,9.21 37.56,9.21
Mechanical 3:
  drawing of 184 lines, arcs and shapes, not listed

## Text inside footprints (layer, text, board x,y; h text height)
P2: Top Overlay "-" at 55.21,12.97 h1 r90; Top Overlay "+" at 54.2,5.12 h1
P3: Bottom Overlay "+" at 54.2,13.78 h1 r180; Bottom Overlay "-" at 55.21,5.93 h1 r90